# EAGLE board ES-miniproject (EAGLE 9.7.0)

Size 221.95 x 124.22 mm. Coordinates in mm from the lower left corner, seen from the top.
Outline: 0,0 221.96,0 221.96,124.22 0,124.22 0,0
Copper layers (1*16): Top 0.035mm / dielectric 1.5mm / Bottom 0.035mm
Design rules "default": minimum track width 6mil, minimum drill 0.35mm, track to track 6mil, track to pad 6mil, pad to pad 6mil, via to via 6mil, smd to smd 6mil, copper to edge 40mil, drill to drill 6mil, minimum pad ring 10mil, minimum via ring 8mil, stop-mask expansion 4mil, vias tented up to drill 0mil, thermal gap 10mil

## Footprints (pad centres in the part's own frame; a part is rotated, then mirrored left to right if it is on the bottom)
LEDRD254W60D565H860B = drill 0.981 pad 1.581: 1 -1.27,0; 2 1.27,0
PIEZO = drill 1 pad 1.6: 1 -3.5,0; 2 3.5,0
28027 = drill 1.016 long: 1 -2.54,0; 2 0,0; 3 2.54,0
RESAD1016W63L850D250B = drill 0.83 pad 1.43: 1 -5.08,0; 2 5.08,0
ARDUINO-UNO-R3-SHIELD = drill 1.016 pad 1.88: 3.3V 24.13,-2.54; 5V 24.13,0; A0 24.13,12.7; A1 24.13,15.24; A2 24.13,17.78; A3 24.13,20.32; A4 24.13,22.86; A5 24.13,25.4; AREF -24.13,-13.97; D2 -24.13,20.32; D3 -24.13,17.78; D4 -24.13,15.24; D5 -24.13,12.7; D6 -24.13,10.16; D7 -24.13,7.62; D8 -24.13,3.81; D9 -24.13,1.27; D10 -24.13,-1.27; D11 -24.13,-3.81; D12 -24.13,-6.35; D13 -24.13,-8.89; GND@0 24.13,2.54; GND@1 24.13,5.08; GND@2 -24.13,-11.43; IOREF 24.13,-7.62; NC 24.13,-10.16; RES 24.13,-5.08; RX -24.13,25.4; SCL -24.13,-19.05; SDA -24.13,-16.51; TX -24.13,22.86; VIN 24.13,7.62
TO92 = drill 0.813 octagon: 1 -1.27,0; 2 0,1.905; 3 1.27,0
JHD-162A = drill 1.016 long: 1 -19.05,0; 2 -16.51,0; 3 -13.97,0; 4 -11.43,0; 5 -8.89,0; 6 -6.35,0; 7 -3.81,0; 8 -1.27,0; 9 1.27,0; 10 3.81,0; 11 6.35,0; 12 8.89,0; 13 11.43,0; 14 13.97,0; 15 16.51,0; 16 19.05,0

## Placement (x,y rotation side)
D1  RED  [LEDRD254W60D565H860B]  10.63,79.18 180 top
PIEZO1  PIEZO  [PIEZO]  54.11,63.24 0 top
PIR1  PIR-SENSOR_28027  [28027]  44.7,29.84 0 top
R1  1k  [RESAD1016W63L850D250B]  42.68,60.7 0 top
R2  0.2k  [RESAD1016W63L850D250B]  185.41,36.61 90 top
R3  1k  [RESAD1016W63L850D250B]  155.5,15.26 90 top
R4  220  [RESAD1016W63L850D250B]  9.39,69.02 90 top
R5  1k  [RESAD1016W63L850D250B]  215.62,115.25 90 top
U1  ARDUINO-UNO-R3-SHIELD  [ARDUINO-UNO-R3-SHIELD]  48.26,29.84 270 top
U2  TMP36GT9Z_TO92  [TO92]  78.24,63.24 0 top
U3  LCD-16X2JHD-162A  [JHD-162A]  30.73,46.48 0 top

## Library data of the parts
D1 = Tinkercad; CATEGORY: Opto-Electronic; SUB-CATEGORY: LED; VALUE: LED_RED
PIEZO1 PIR1 R1-R5 U1-U3 = Tinkercad

## Nets
D1_C: D1.2 R4.2
PIEZO1_1: PIEZO1.1 R1.2
U1_5V: R2.2 U1.5V U2.3 U3.2
U1_A0: U1.A0 U2.2
U1_D2: U1.D2 U3.14
U1_D3: U1.D3 U3.13
U1_D4: U1.D4 U3.12
U1_D5: U1.D5 U3.11
U1_D11: U1.D11 U3.6
U1_D12: D1.1 U1.D12 U3.4
U1_D13: R1.1 U1.D13
U1_GND: PIEZO1.2 R3.2 R4.1 U1.GND@0 U1.GND@1 U1.GND@2 U2.1 U3.1 U3.5 U3.16
U3_LED+: R2.1 U3.15

## Tracks (layer width: path | path; a pad name or v marks a point on that pad's centre or on a via)
D1_C  (1 unrouted)
PIEZO1_1  (1 unrouted)
U1_5V  (3 unrouted)
U1_A0  (1 unrouted)
U1_D2  (1 unrouted)
U1_D3  (1 unrouted)
U1_D4  (1 unrouted)
U1_D5  (1 unrouted)
U1_D11  (1 unrouted)
U1_D12  (2 unrouted)
U1_D13  (1 unrouted)
U1_GND  (9 unrouted)
U3_LED+  (1 unrouted)